# Altium PCB gimbalPCB.PcbDoc (part 2 of 2)
Units mil, origin at the board's own origin, x right, y up, seen from the top; angles counter-clockwise.
Board outline 2880 x 3030 mil, 2 copper layers (Top Layer, Bottom Layer); 107 components, 57 nets, 327 pads, 91 vias.
Unrouted connection lines stored in the file: 9.
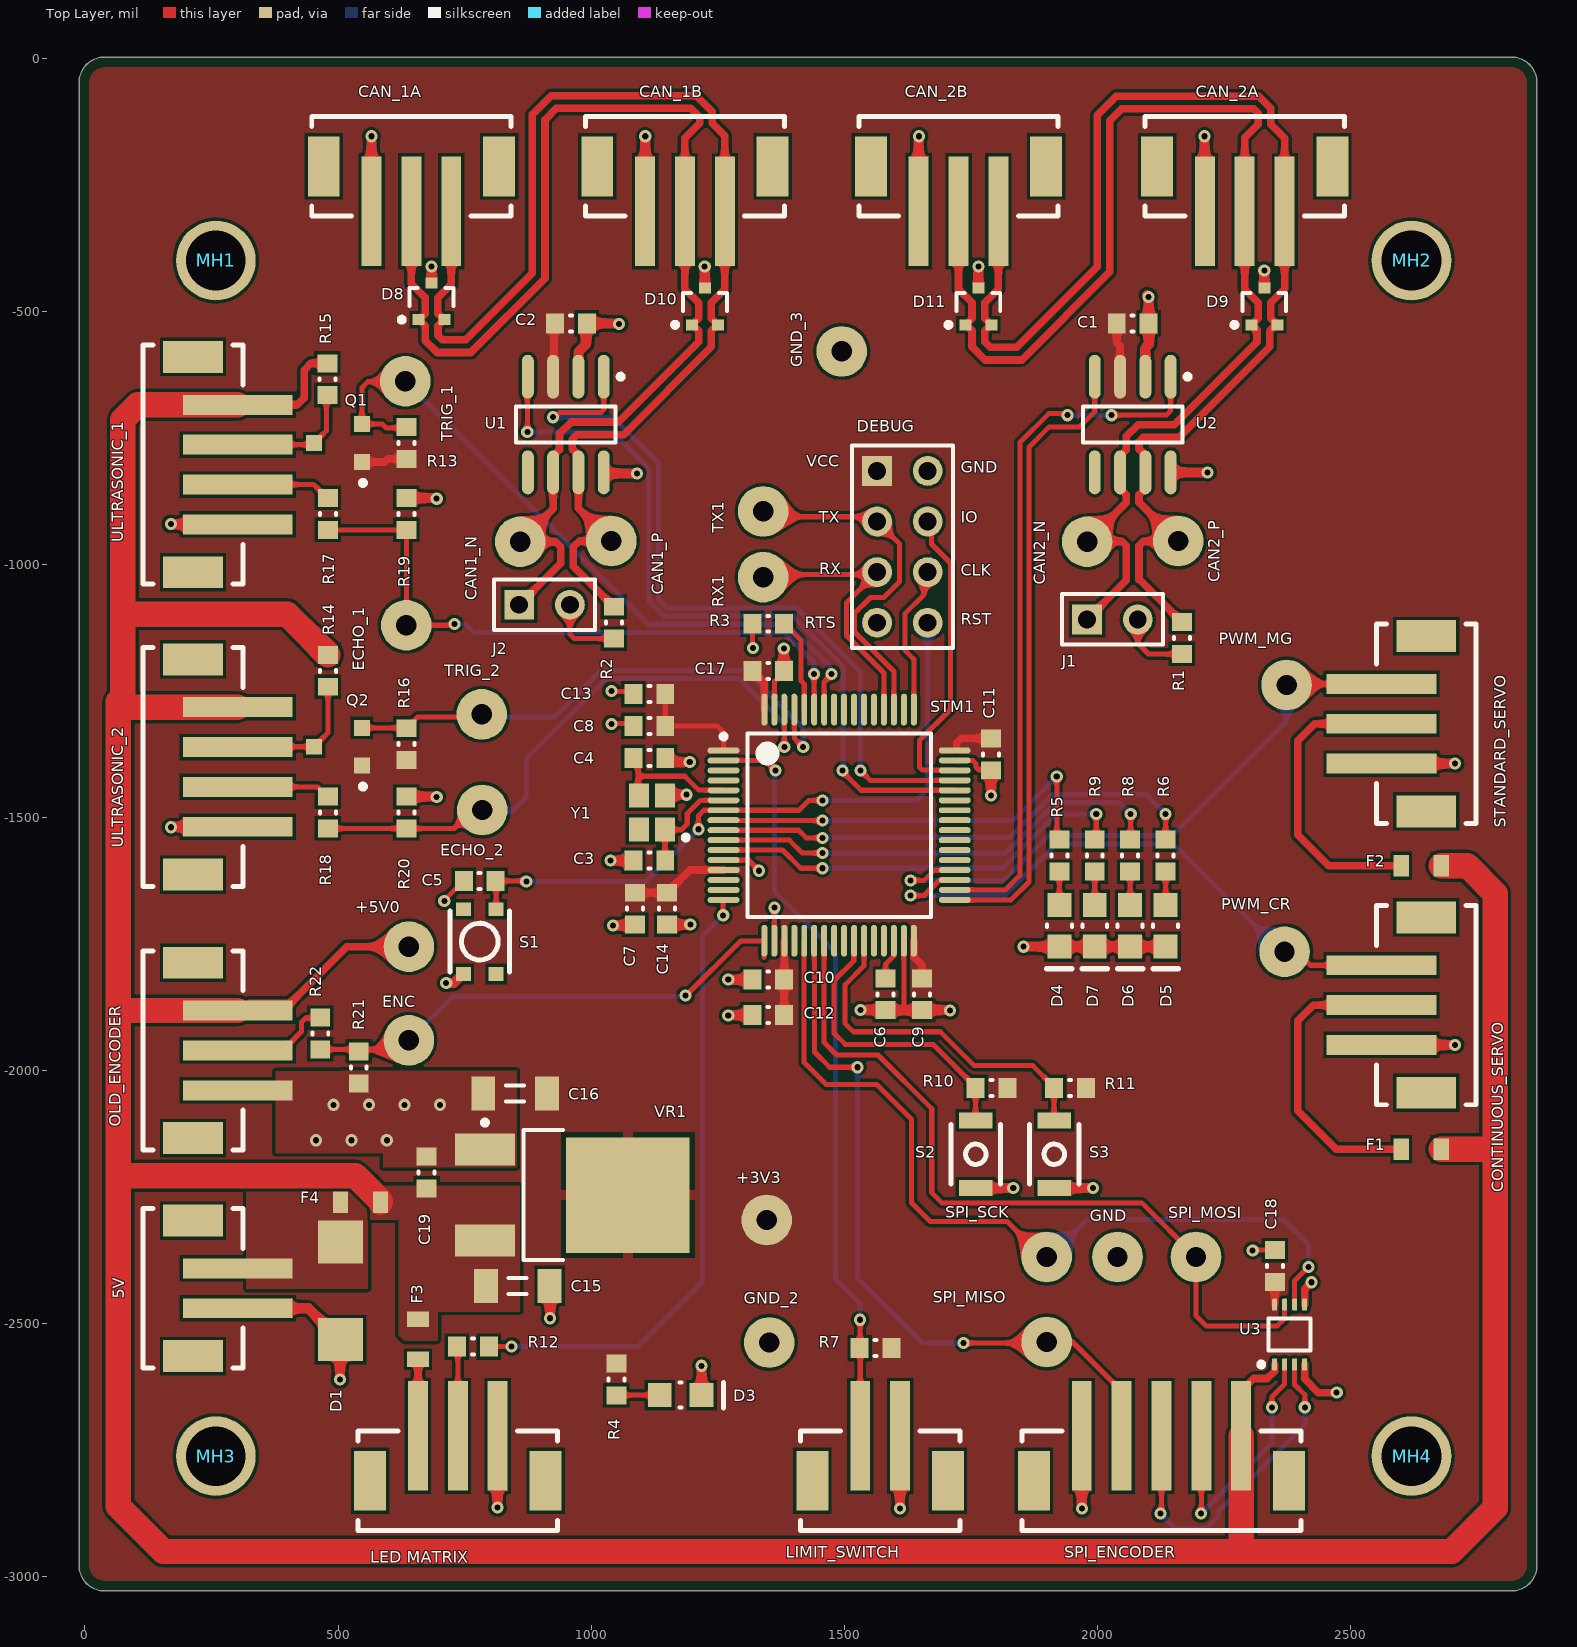
[diagram p0: Top Layer view]

## Via types
v1: diameter 24, hole 12, Top Layer to Bottom Layer, tented both sides, 91 vias

## Nets (pads, with @x,y where several pads share a name; then routed paths per layer and width w, separated by ;. In a path a pad name is that pad's centre, name@x,y a point inside that pad or via, vN(x,y) a via of type N, cw(c..) or ccw(c..) an arc to the next point about the centre after c; other vN are vias at no path point) (continued)
SPI1_SCK: (continued)
  Top Layer w10: STM1.21@1421.45,-1743.84 1421.45,-1769.77 1421.1,-1769.43 STM1.21 1421,-1743.45 1421,-1984 1464,-2027 1564,-2027 1633,-2096 1633,-2261 1670,-2298 1822,-2298 1885,-2361 SPI_SCK.1@1885,-2364 ; U3.6 2389.84,-2415.16 v1(2417,-2388)
  Bottom Layer w10: SPI_SCK.1 1906,-2368 1980,-2294 2368,-2294 2417,-2343 v1(2417,-2388)
SWD_CLK: DEBUG.7 STM1.49 | length 297.2
  Top Layer w10: STM1.49 1637.64,-1187.15 1620.47,-1169.98 1620.47,-1096.56 1657.5,-1059.53 1657.5,-1022.5 DEBUG.7
SWD_IO: DEBUG.6 STM1.46 | length 601.4
  Top Layer w10: DEBUG.6 1672.5,-922.5 1672.5,-959.53 1710,-997.03 1710,-1286.42 1649,-1347.42 1649,-1400.53 1654.86,-1406.39 1718,-1406.39 STM1.46
UART_RX: DEBUG.3 RX1.1 STM1.52 | length 549.5
  Top Layer w10: RX1.1 1345,-1020 DEBUG.3@1560,-1020 ; DEBUG.3 DEBUG.3@1560,-1020 ; STM1.52 1578.58,-1214.18 1504.47,-1140.07 1504.47,-1075.53 DEBUG.3@1560,-1020
UART_TX: DEBUG.2 STM1.51 TX1.1 | length 707.7
  Top Layer w10: TX1.1 1350.61,-905.61 1555.61,-905.61 1609.53,-959.53 1609.53,-1033.44 1577.97,-1065 1552.03,-1065 1520.47,-1096.56 1520.47,-1133.44 1598.27,-1211.24 STM1.51
ULTRA_1_ECHO: ECHO_1.1 R17.1 R19.2 STM1.59 | length 1278.7
  Top Layer w10: R17.1 R19.2 ECHO_1.1 727.35,-1120 v1(730,-1117.35) ; v1(1440.43,-1216.4) 1440.61,-1216.58 1440.61,-1286.47 STM1.59
  Bottom Layer w10: v1@732.68,-1114.67 v1(730,-1117.35) 751.65,-1117.35 768.29,-1134 1381,-1134 1440.43,-1193.43 v1(1440.43,-1216.4)
ULTRA_1_LVL_SHIFT: Q1.3 R15.1 ULTRASONIC_1.2 | length 257.5
  Top Layer w10: ULTRASONIC_1.2 449.53,-763.23 477,-735.76 477,-667.5 R15.1
ULTRA_1_TRIG: Q1.2 R13.2 STM1.58 TRIG_1.1 | length 1417.4
  Top Layer w10: TRIG_1.1 632,-639 559,-639 547.24,-650.76 Q1.2 587.6,-722.6 595,-730 633.5,-730 R13.2 ; STM1.58 1460.47,-1232.32 v1@1475,-1217.79
  Bottom Layer w10: TRIG_1.1 1113,-1118 1387.63,-1118 1472.32,-1202.69 1472.32,-1215.11 v1@1474.11,-1216.9
  other v1: 1475,-1216.4
ULTRA_2_ECHO: ECHO_2.1 R18.1 R20.2 STM1.62 | length 1226.9
  Top Layer w10: R18.1 R20.2 729.57,-1521.5 766.07,-1485 ECHO_2.1 ; v1(1381.73,-1360.62) STM1.62
  Bottom Layer w10: ECHO_2.1 786,-1486 846,-1486 872,-1460 872,-1384 1031,-1225 1292,-1225 1381.73,-1314.73 v1(1381.73,-1360.62)
ULTRA_2_LVL_SHIFT: Q2.3 R14.1 ULTRASONIC_2.2 | length 280.8
  Top Layer w10: ULTRASONIC_2.2 302.64,-1360 Q2.3 480,-1332.76 R14.1
ULTRA_2_TRIG: Q2.2 R16.2 STM1.61 TRIG_2.1 | length 1085.4
  Top Layer w10: Q2.2 629.09,-1322.6 R16.2@631.5,-1325 ; R16.2 657.5,-1301 TRIG_2.1@794,-1301 ; STM1.61 1401.42,-1343.42 v1@1419,-1361
  Bottom Layer w10: TRIG_2.1 TRIG_2.1@786,-1298 ; TRIG_2.1@794,-1301 928,-1301 997,-1232 1020,-1209 1304,-1209 1419,-1324 v1(1419,-1360.62)
pads on no net: 5V.3 5V.4 "LED MATRIX.4" "LED MATRIX.5" CAN_1A.4 CAN_1A.5 CAN_1B.4 CAN_1B.5 CAN_2A.4 CAN_2A.5 CAN_2B.4 CAN_2B.5 CONTINUOUS_SERVO.4 CONTINUOUS_SERVO.5 DEBUG.4 LIMIT_SWITCH.3 LIMIT_SWITCH.4 MH1.0 MH2.0 MH3.0 MH4.0 OLD_ENCODER.4 OLD_ENCODER.5 S1.2 S1.3 SPI_ENCODER.6 SPI_ENCODER.7 STANDARD_SERVO.4 STANDARD_SERVO.5 STM1.3 STM1.4 STM1.14 STM1.15 STM1.20 STM1.24 STM1.25 STM1.28 STM1.29 STM1.37 STM1.38 STM1.39 STM1.40 STM1.41 STM1.42 STM1.43 STM1.50 STM1.53 STM1.54 STM1.55 STM1.56 STM1.57 U1.5 U2.5 ULTRASONIC_1.5 ULTRASONIC_1.6 ULTRASONIC_2.5 ULTRASONIC_2.6 Y1.4

## Polygon pours and split planes (outlines as drawn)
+3V3 on Top Layer "+3V3_L01_P013" (solid, pour order 13): -210.85,137.51 -200.85,147.51 2958.15,147.51 2958.15,-3187.49 2932.15,-3161.49 -236.85,-3161.49
"Net 5V _1" on Top Layer "NET_5V__1_L01_P011" (solid, pour order 11): 520,-2236 559,-2275 559,-2431 550,-2431 319,-2431 319,-2237 317,-2237
GND on Top Layer "GND_L01_P012" (solid, pour order 12): 506,-2000 852,-2000 853,-1999 853,-2191 589,-2191 589,-2163 377,-2163 377,-2001
+5V0 on Top Layer "Top Layer-+5V0" (solid, pour order 9): 563,-2228 564,-2227 859,-2227 859,-2476 697,-2476 697,-2532 695,-2534 631,-2534 620,-2523 620,-2294 564,-2294
GND on Bottom Layer "GND_L02_P003" (solid, pour order 3): -205,130 2975,130 3050,55 3000,5 3000,-3100 -205,-3100 -235,-3130

## Silkscreen, mask and mechanical layers (free items; w line width, h text height)
Mechanical 1:
  circle w0.5: c2620.83,-399.29 r59.06
  circle w0.5: c258.62,-2761.5 r59.06
  circle w0.5: c2620.83,-2761.5 r59.06
  circle w0.5: c258.62,-399.29 r59.06
Mechanical 3 [Outline] (Mech3):
  the board outline again, w1

## Text inside footprints (layer, text, board x,y; h text height)
DEBUG: Top Overlay "TX" at 1450,-925 h40; Top Overlay "RX" at 1450.91,-1027.6 h40; Top Overlay "RTS" at 1422.28,-1133.9 h40; Top Overlay "IO" at 1730.04,-925.24 h40; Top Overlay "CLK" at 1730,-1030 h40; Top Overlay "RST" at 1730.04,-1126.81 h40; Top Overlay "VCC" at 1425,-815 h40; Top Overlay "GND" at 1730.04,-826.81 h40